# Altium PCB lightshowctl.PcbDoc
Units mil, origin at the board's own origin, x right, y up, seen from the top; angles counter-clockwise.
Board outline 900 x 6692.91 mil, 4 copper layers (Component Side, Ground Plane, Power Plane, Solder Side), stack 33.234 mil thick; 46 components, 37 nets, 236 pads, 70 vias.
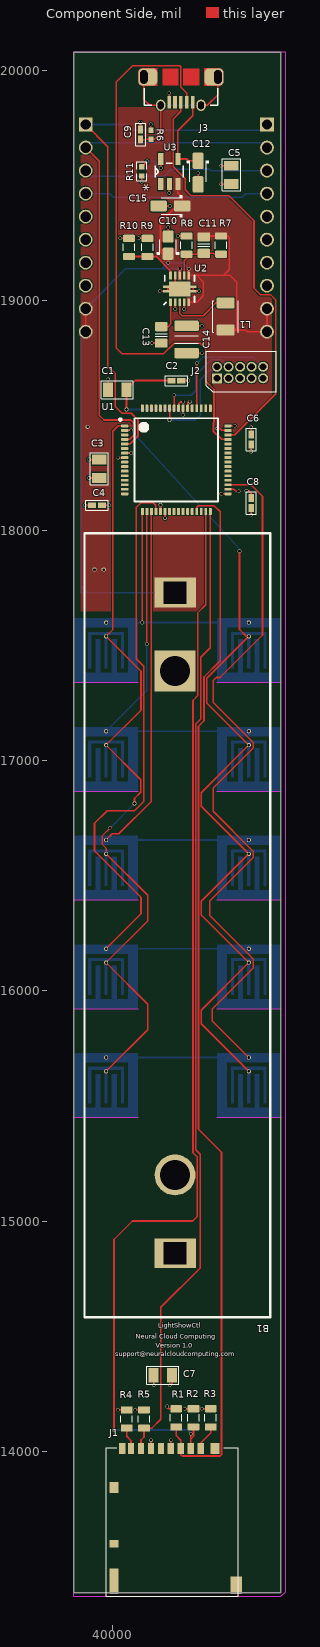
[diagram p0: Component Side view]
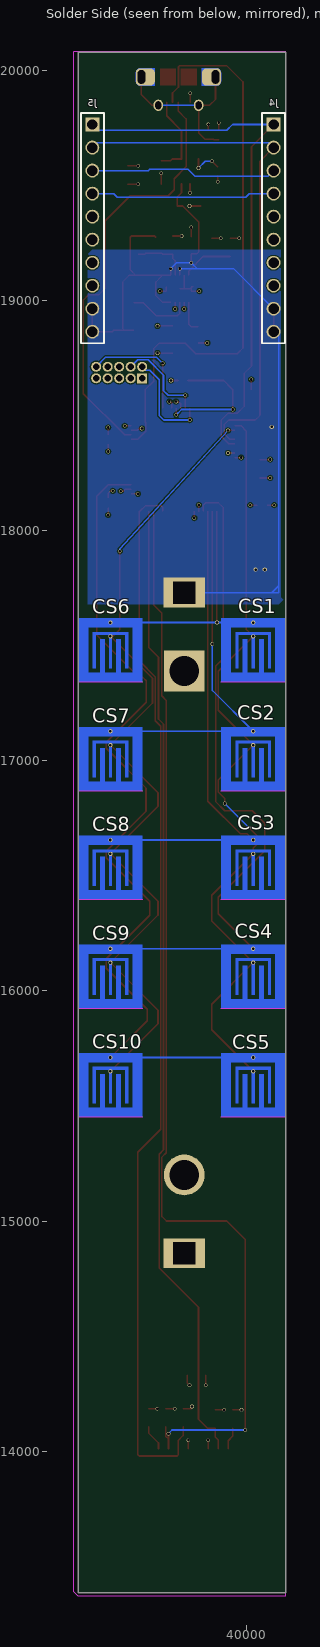
[diagram p1: Solder Side view, seen from below]
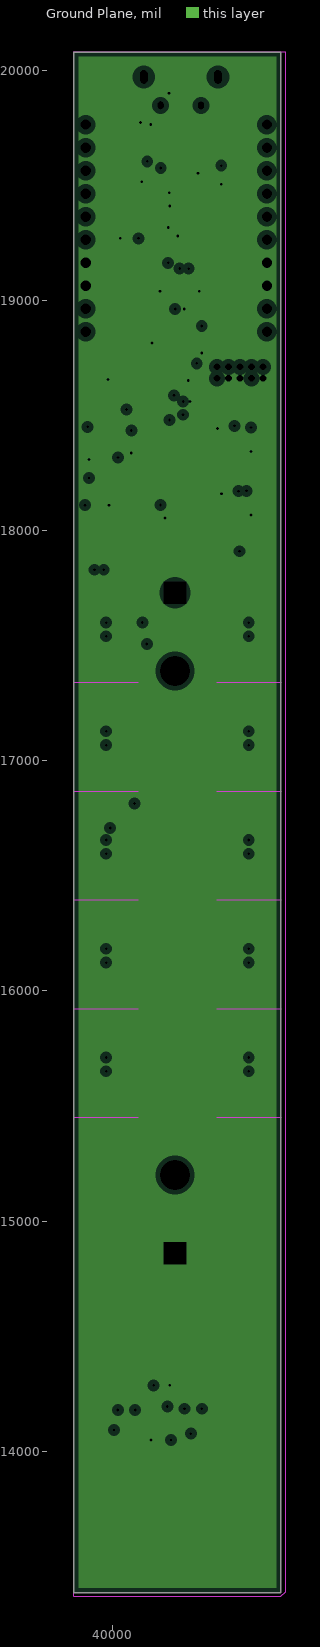
[diagram p2: Ground Plane, clearances drawn from the general rule]
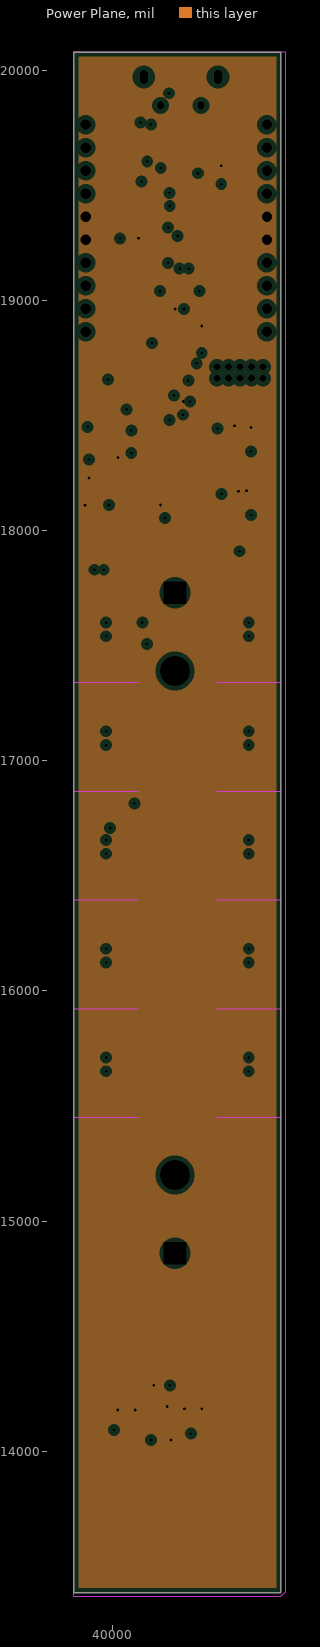
[diagram p3: Power Plane, clearances drawn from the general rule]
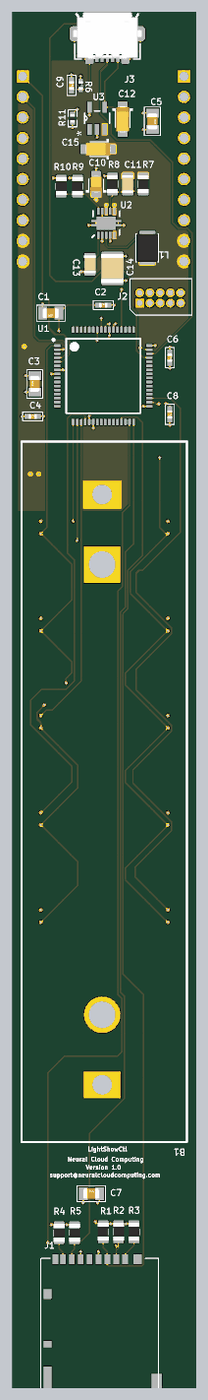
[diagram p4: 3D render of the assembled board from above, using the file's embedded part models]

## Layer stack, top to bottom
Top Solder: solder mask 0.4, Solder Resist, Dk 3.5
Component Side: signal copper 1.4
Dielectric 1: core 12.6, FR-4, Dk 4.8
Ground Plane: plane copper 1.417, net GND
Dielectric 3: prepreg 5, Dk 4.2
Power Plane: plane copper 1.417, net VCC
Dielectric 4: core 10, Dk 4.2
Solder Side: signal copper 1.4
Bottom Solder: solder mask 0.4, Solder Resist, Dk 3.5

## Board outline
39830,20078.74 39830,13385.83 40730,13385.83 40730,20078.74 40157.48,20078.74

## Design rules (kind name [scope] priority, off if disabled: settings)
Clearance [All] p1: gap=5
FanoutControl Fanout_Small [(CompPinCount < 5)] p4: bgadir=Out bgaviamode=Centered fanoutstyle=Auto fanoutdirection=InThenOut viagrid=1 // Fanout_Small (Default Rule)
Height [All] p1: minheight=0 maxheight=1968.5 prefheight=500
HoleSize [All] p1: absolutevalues=TRUE maxlimit=393.7 minlimit=1 maxpercent=80.000 minpercent=20.000
MinimumSolderMaskSliver [All] p1: minsoldermaskwidth=0.04
PlaneClearance [All] p1: clearance=20
PlaneConnect [All] p1: planeconnectstyle=Direct reliefexpansion=20 reliefentries=4 reliefconductorwidth=10 reliefairgap=10
PolygonConnect [All] p1: connectstyle=Direct reliefconductorwidth=10 reliefentries=4 polygonreliefangle="90 Angle" airgapwidth=10
RoomDefinition Sheet4_Switch [InComponentClass('Sheet4_Switch')] p1: confinementstyle=ConfineIn formatcopy=TRUE lockcomponents=FALSE outline 0,0 2000,0 2000,1000 0,1000
RoomDefinition Sheet3_Bat [InComponentClass('Sheet3_Bat')] p2: confinementstyle=ConfineIn formatcopy=TRUE lockcomponents=FALSE outline 0,0 2000,0 2000,1000 0,1000
RoomDefinition Sheet2_led [InComponentClass('Sheet2_led')] p3: confinementstyle=ConfineIn formatcopy=TRUE lockcomponents=FALSE outline 0,0 2000,0 2000,1000 0,1000
RoomDefinition Sheet1_Cpu [InComponentClass('Sheet1_Cpu')] p4: confinementstyle=ConfineIn formatcopy=TRUE lockcomponents=FALSE outline 0,0 2000,0 2000,1000 0,1000
RoutingLayers RoutingLayers_VCCBAT [InNet('VCCBAT')] p1 off: top layer_v5=TRUE bottom layer_v5=FALSE
RoutingLayers [All] p2: top layer_v5=TRUE bottom layer_v5=TRUE
RoutingTopology [All] p1: topology=Vertical
RoutingVias [All] p1: holewidth=11.81 width=15.75 viastyle="Through Hole" minholewidth=11.81 minwidth=15.75 maxholewidth=11.81 maxwidth=15.75
SMDNeckDown [All] p1: percent=50.000
SilkToSilkClearance [All] p1: silktosilkclearance=6
SilkToSolderMaskClearance [IsPad] p1: minsilkscreentomaskgap=4 clearancetoexposedcopper=TRUE
SolderMaskExpansion [All] p1: expansion=4
Width [All] p1: maxlimit=100 minlimit=5 preferedwidth=7 minimp=50.000000 maximp=50.000000 favimp=50.000000
20 further rules are at their usual default settings.

## Classes and differential pairs
component class Sheet1_Cpu: C1 C3 C5 C6 C7 C8 C9 J3 R6 U1
component class Sheet3_Bat: B1 C10 R7

## Components (designator, comment, footprint, x,y, rotation, side; value= is the part's Value field where it differs from the comment)
B1 "BK-18650-PC2" BK-18650-PC2 40270,16295 r270 top
C1 "" AP1-00041 40059.06,18612.2 r180 top
C2 "CAP-NONPOL" AP1-00001 40275.59,18651.57 r0 top
C3 "" AP1-00041 39940.94,18228.35 r90 top
C4 "CAP-NONPOL" AP1-00001 39931.1,18110.24 r0 top
C5 "" AP1-00041 40515,19585 r270 top
C6 "CAP-NONPOL" AP1-00001 40600.39,18395.67 r270 top
C7 "" AP1-00041 40177.17,14330.71 r0 top
C8 "CAP-NONPOL" AP1-00001 40600.39,18120.08 r270 top
C9 "CAP-NONPOL" AP1-00001 40120,19720 r270 top
C10 "10µ" CAPMP2012X150USR 40240,19240 r90 top
C11 "approved sub OK" CAPC2012X135N 40395,19240 r270 top
C12 "4µ7" CAPMP3216X180N 40370,19555 r270 top
C13 "approved sub OK" CAPC2012X135N 40210,18850 r270 top
C14 "approved sub OK" CAPC3225X220N 40320,18830 r270 top
C15 "4µ7" CAPMP3216X180N 40250,19410 r180 top
CS1 "QMatrix Button" QTOUCHSW 39970.47,17480.31 r180 bottom
CS2 "QMatrix Button" QTOUCHSW 39970.47,17007.87 r180 bottom
CS3 "QMatrix Button" QTOUCHSW 39970.47,16535.43 r180 bottom
CS4 "QMatrix Button" QTOUCHSW 39970.47,16062.99 r180 bottom
CS5 "QMatrix Button" QTOUCHSW 39970.47,15590.55 r180 bottom
CS6 "QMatrix Button" QTOUCHSW 40590.55,17480.31 r180 bottom
CS7 "QMatrix Button" QTOUCHSW 40590.55,17007.87 r180 bottom
CS8 "QMatrix Button" QTOUCHSW 40590.55,16535.43 r180 bottom
CS9 "QMatrix Button" QTOUCHSW 40590.55,16062.99 r180 bottom
CS10 "QMatrix Button" QTOUCHSW 40590.55,15590.55 r180 bottom
J1 "MicroSD" DM3AT-SF-PEJM5 40255.91,14015.75 r0 top
J2 "3220-10-0100 SWD" 3220-10-0100 40452.76,18661.42 r90 top
J3 "ZX62D-AB-5P8" AP8-00852 40295.28,19970.47 r180 top
J4 "PPTC101LFBN-RC" PPTC101LFBN-RC 39881.89,19763.78 r270 bottom
J5 "PPTC101LFBN-RC" PPTC101LFBN-RC 40669.29,19763.78 r270 bottom
L1 "NLCV32T" INDM3225X240N 40490,18930 r90 top
R1 "Thick Film" RESC2012X70N 40275,14145 r270 top
R2 "Thick Film" RESC2012X70N 40350,14145 r270 top
R3 "Thick Film" RESC2012X70N 40425,14145 r90 top
R4 "Thick Film" RESC2012X70N 40060,14140 r90 top
R5 "Thick Film" RESC2012X70N 40135,14140 r90 top
R6 "R2" AP2-00011 40165,19720 r270 top
R7 "Thick Film" RESC2012X70N 40470,19240 r270 top
R8 "Thick Film" RESC2012X70N 40320,19240 r90 top
R9 "Thick Film" RESC2012X70N 40150,19230 r270 top
R10 "Thick Film" RESC2012X70N 40070,19230 r90 top
R11 "2k" RESC1005X40N 40125,19560 r90 top
U1 "SAMD21TQFP64" TSQFP50P1300X1300X120-64N 40275.59,18307.09 r0 top
U2 "TPS61200DRCR" QFN-10_PAD 40290,19050 r0 top
U3 "MCP73831T-2DCI/OT" SOT95P270X145-5N 40245,19560 r90 top

## Footprints (in the part's own frame and the unit in brackets; to place one, negate y for a bottom-side part, rotate by r counter-clockwise, add the part's x,y. Pads: shape width x height; smd on the part's side, far side on the other; paste and mask are expansions set on the pad)
3220-10-0100 [mm]
  rect 1.1x1.1 hole 0.75: 1(0,0)
  round 1.1 hole 0.75: 2(1.27,0) 3(0,-1.27) 4(1.27,-1.27) 5(0,-2.54) 6(1.27,-2.54) 7(0,-3.81) 8(1.27,-3.81) 9(0,-5.08) 10(1.27,-5.08)
  silkscreen extent -1.5,-6.5 3,1.2
AP1-00001 [mm] "Standard 0402 SMD capacitor footprint"
  rect 0.9x0.6 smd: 1(-0.55,0) 2(0.55,0)
  silkscreen extent -1.25,-0.55 1.25,0.55, body extent -0.5,-0.3 0.5,0.3, height 0.2
AP1-00041 [mil]
  rect 43x63 smd: 1(0,0) 2(80,0)
  silkscreen extent -30,-39 109,39, body extent 1,-25 79,25, height 31
AP2-00011 [mm] "Chip Resistor, 2-Leads, Body 1,0x0,5mm, IPC High Density"
  rect 0.6x0.55 smd: 1(-0.5,0) 2(0.5,0)
  body extent -0.5,-0.3 0.5,0.3, height 0.2
AP8-00852 [mm] "Hirose, ZX Series, USB Micro-AB Recept-RA"
  rect 0.4x1.35 smd: 1(-1.3,2.8) 2(-0.65,2.8) 3(0,2.8) 4(0.65,2.8) 5(1.3,2.8)
  rrect52% 2.1x1.9 hole 0.825 slot 1.5 at 90 deg copper offset 0.437,0: 6(-4.088,0)
  rrect50% 2.1x1.9 on Top Paste: 6(-3.6,0) 7(3.6,0)
  rrect52% 2.1x1.9 hole 0.825 slot 1.5 at 90 deg copper offset -0.437,0: 7(4.088,0)
  rrect100% 1.05x1.25 hole 0.65 slot 0.85 at 90 deg: 8(-2.225,3.125) 9(2.225,3.125)
  rrect50% 1.05x1.25 on Top Paste: 8(-2.225,3.125) 9(2.225,3.125)
  Component Side region: 0.25,-0.95 2.05,-0.95 2.05,0.95 0.25,0.95
  Component Side region: -2.05,-0.95 -0.25,-0.95 -0.25,0.95 -2.05,0.95
  Component Side region: 2.6,-0.95 4.2,-0.95 4.294,-0.941 4.381,-0.915 4.434,-0.891 4.48,-0.862 4.52,-0.832 4.565,-0.791 4.596,-0.753 4.622,-0.716 4.647,-0.673 4.66,-0.64 4.676,-0.6 4.688,-0.55 4.696,-0.505 4.7,-0.45 4.7,0.45 4.696,0.503 4.689,0.548 4.677,0.599 4.661,0.641 4.641,0.683 4.617,0.724 4.589,0.761 4.56,0.797 4.521,0.831 4.483,0.86 4.439,0.888 4.397,0.908 4.354,0.924 4.301,0.939 4.248,0.946 4.2,0.95 2.6,0.95
  Component Side region: -2.6,0.95 -4.2,0.95 -4.294,0.941 -4.381,0.915 -4.434,0.891 -4.48,0.862 -4.52,0.832 -4.565,0.791 -4.596,0.753 -4.622,0.716 -4.647,0.673 -4.66,0.64 -4.676,0.6 -4.688,0.55 -4.696,0.505 -4.7,0.45 -4.7,-0.45 -4.696,-0.503 -4.689,-0.548 -4.677,-0.599 -4.661,-0.641 -4.641,-0.683 -4.617,-0.724 -4.589,-0.761 -4.56,-0.797 -4.521,-0.831 -4.483,-0.86 -4.439,-0.888 -4.397,-0.908 -4.354,-0.924 -4.301,-0.939 -4.248,-0.946 -4.2,-0.95 -2.6,-0.95
  Component Side pour cut-out: -3.75,1.975 3.75,1.975 3.75,-1.325 -3.75,-1.325
  Solder Side region: -2.6,0.95 -4.2,0.95 -4.294,0.941 -4.381,0.915 -4.434,0.891 -4.48,0.862 -4.52,0.832 -4.565,0.791 -4.596,0.753 -4.622,0.716 -4.647,0.673 -4.66,0.64 -4.676,0.6 -4.688,0.55 -4.696,0.505 -4.7,0.45 -4.7,-0.45 -4.696,-0.503 -4.689,-0.548 -4.677,-0.599 -4.661,-0.641 -4.641,-0.683 -4.617,-0.724 -4.589,-0.761 -4.56,-0.797 -4.521,-0.831 -4.483,-0.86 -4.439,-0.888 -4.397,-0.908 -4.354,-0.924 -4.301,-0.939 -4.248,-0.946 -4.2,-0.95 -2.6,-0.95
  Solder Side region: 2.6,-0.95 4.2,-0.95 4.294,-0.941 4.381,-0.915 4.434,-0.891 4.48,-0.862 4.52,-0.832 4.565,-0.791 4.596,-0.753 4.622,-0.716 4.647,-0.673 4.66,-0.64 4.676,-0.6 4.688,-0.55 4.696,-0.505 4.7,-0.45 4.7,0.45 4.696,0.503 4.689,0.548 4.677,0.599 4.661,0.641 4.641,0.683 4.617,0.724 4.589,0.761 4.56,0.797 4.521,0.831 4.483,0.86 4.439,0.888 4.397,0.908 4.354,0.924 4.301,0.939 4.248,0.946 4.2,0.95 2.6,0.95
  silkscreen extent -4.05,1.23 4.05,3.13, body extent -4.32,-2.65 4.33,3.25, height 2.78
BK-18650-PC2 [mm] "BC-86650-PC2 Battery Holder"
  rect 3.302x4.572 hole 2.438 square: 1(-36.45,0) 2(36.45,0)
  rect 4.5x4.5 hole 3.3: 3(-27.805,0)
  round 4.5 hole 3.3: 4(27.805,0)
  silkscreen extent -43,-10 43.5,10.5
CAPC2012X135N [mm] "Chip Capacitor, Body 2.0x1.2mm, EIA 0805, IPC Medium Density"
  round 0.254 on Mech15: 0(0,0)
  rrect25% 1x1.4 smd: 1(-0.9,0) 2(0.9,0)
  Component Side pour cut-out: -0.675,0.7 -0.475,0.9 0.475,0.9 0.675,0.7 0.675,-0.7 0.475,-0.9 -0.475,-0.9 -0.675,-0.7
  silkscreen extent -0.15,-0.65 0.15,0.65, body extent -1.1,-0.72 1.1,0.73, height 1.34
CAPC3225X220N [mm] "Chip Capacitor, Body 3.2x2.5mm, EIA 1210, IPC Medium Density"
  round 0.508 on Mech15: 0(0,0)
  rrect25% 1.15x2.7 smd: 1(-1.5,0) 2(1.5,0)
  silkscreen extent -0.4,-1.3 0.4,1.3, body extent -1.8,-1.4 1.8,1.4, height 2.19
CAPMP2012X150USR [mm] "Molded body capacitor, Body 2.0x1.2mm, 0805, IPC Medium Density"
  round 0.254 on Mech15: 0(0,0)
  rrect25% 1.35x1.2 smd: 1(-0.95,0) 2(0.95,0)
  Component Side pour cut-out: -0.4,0.8 0.4,0.8 0.4,-0.8 -0.4,-0.8
  silkscreen extent -1,-1.2 0.6,1.2, body extent -1.02,-0.67 1.03,0.68, height 1.5
CAPMP3216X180N [mm] "Capacitor, polarized, Molded Body, EIA 535BAAC size A; 3.20mm L X 1.60mm W X 1.80mm H"
  round 0.508 on Mech15: 0(0,0)
  rrect25% 1.8x1.2 smd: 1(-1.3,0) 2(1.3,0)
  silkscreen extent -1.3,-1.2 1,1.2, body extent -1.6,-0.8 1.6,0.8, height 1.8
DM3AT-SF-PEJM5 [mm]
  rect 0.7x1.2 smd: 1(3.2,-0.1) 2(2.1,-0.1) 3(1,-0.1) 4(-0.1,-0.1) 5(-1.2,-0.1) 6(-2.3,-0.1) 7(-3.4,-0.1) 8(-4.5,-0.1) B(-5.45,-0.1)
  rect 1x0.8 smd: A(-6.4,-10.6)
  rect 1x1.2 smd: MOUNT0(4.75,-0.1) MOUNT1(-6.4,-4.4)
  rect 1x2.8 smd: MOUNT2(-6.4,-14.75)
  rect 1.3x1.9 smd: MOUNT3(7.1,-15.2)
  silkscreen extent -7.24,-16.38 7.35,0
INDM3225X240N [mm] "Molded Inductor, 2-Leads, Body 3.2x2.5mm, IPC Medium Density"
  round 0.508 on Mech15: 0(0,0)
  rrect25% 1.2x2 smd: 1(-1.5,0) 2(1.5,0)
  silkscreen extent -1.75,-1.4 1.75,1.4, body extent -1.79,-1.35 1.79,1.35, height 2.4
PPTC101LFBN-RC [mil] "Sullins 10 Pin .100 spacing Femal connector - Single Role"
  rect 60x60 hole 45: 1(0,0)
  round 60 hole 45: 2(100,0) 3(200,0) 4(300,0) 5(400,0) 6(500,0) 7(600,0) 8(700,0) 9(800,0) 10(900,0)
  silkscreen extent -50,-50 950,50
QFN-10_PAD [mm]
  rect 0.297x0.85 smd: 1(-1,-1.475) 2(-0.5,-1.475) 3(0,-1.475) 4(0.5,-1.475) 5(1,-1.475) 6(1,1.475) 7(0.5,1.475) 8(0,1.475) 9(-0.5,1.475) 10(-1,1.475)
  rect 0.7x0.28 smd: 11(-1.5,0.25) 12(-1.5,-0.25) 13(1.5,0.25) 14(1.5,-0.25)
  rect 2.4x1.65 smd: 15(0,0)
  silkscreen extent -1.75,-1.75 1.65,1.5
QTOUCHSW [mil]
  round 18 hole 11: X(0,120) Y(0,60)
  Component Side region: 76.77,78.74 76.77,-78.74 64.96,-78.74 64.96,66.93 5.91,66.93 5.91,-78.74 -5.91,-78.74 -5.91,66.93 -64.96,66.93 -64.96,-78.74 -64.96,-78.74 -76.77,-78.74 -76.77,78.74 76.77,78.74 76.77,78.74
  Component Side region: 137.8,137.8 -137.8,137.8 -137.8,-137.8 137.8,-137.8 137.8,137.8 96.46,98.43 96.46,-98.43 45.28,-98.43 45.28,47.24 25.59,47.24 25.59,-98.43 -25.59,-98.43 -25.59,47.24 -45.28,47.24 -45.28,-98.43 -96.46,-98.43 -96.46,98.43 96.46,98.43 137.8,137.8
  Keep-Out Layer lines w5: 140,-140 -140,-140
RESC1005X40N [mm] "Chip Resistor, Body 1.0x0.5mm, EIA 0402, IPC Medium Density"
  round 0.2 on Mech15: 0(0,0)
  rrect20% 0.6x0.6 smd: 1(-0.5,0) 2(0.5,0)
  Component Side pour cut-out: -0.325,0.375 -0.2,0.5 0.2,0.5 0.325,0.375 0.325,-0.375 0.2,-0.5 -0.2,-0.5 -0.325,-0.375
  silkscreen extent -1.05,-0.55 1.05,0.55, body extent -0.52,-0.27 0.53,0.28, height 0.4
RESC2012X70N [mm] "Chip Resistor, Body 2.0x1.2mm, EIA 0805, IPC Medium Density"
  round 0.254 on Mech15: 0(0,0)
  rrect25% 0.8x1.3 smd: 1(-1,0) 2(1,0)
  Component Side pour cut-out: -0.725,0.65 -0.525,0.85 0.525,0.85 0.725,0.65 0.725,-0.65 0.525,-0.85 -0.525,-0.85 -0.725,-0.65
  silkscreen extent -0.38,-0.64 0.38,0.64, body extent -1.1,-0.67 1.1,0.68, height 0.69
SOT95P270X145-5N [mil]
  rect 52x22 smd: 1(-54,37) 2(-54,0) 3(-54,-37) 4(54,-37) 5(54,37)
  silkscreen extent -25,-61 35,61
TSQFP50P1300X1300X120-64N [mm] "TSQFP, 64-Leads, Body 10.00x10.00mm, Pitch 0.50mm, IPC Medium Density"
  rrect50% 0.8x0.32 smd: 1(-5.7,3.75) 2(-5.7,3.25) 3(-5.7,2.75) 4(-5.7,2.25) 5(-5.7,1.75) 6(-5.7,1.25) 7(-5.7,0.75) 8(-5.7,0.25) 9(-5.7,-0.25) 10(-5.7,-0.75) 11(-5.7,-1.25) 12(-5.7,-1.75) 13(-5.7,-2.25) 14(-5.7,-2.75) 15(-5.7,-3.25) 16(-5.7,-3.75) 33(5.7,-3.75) 34(5.7,-3.25) 35(5.7,-2.75) 36(5.7,-2.25) 37(5.7,-1.75) 38(5.7,-1.25) 39(5.7,-0.75) 40(5.7,-0.25) 41(5.7,0.25) 42(5.7,0.75) 43(5.7,1.25) 44(5.7,1.75) 45(5.7,2.25) 46(5.7,2.75) 47(5.7,3.25) 48(5.7,3.75)
  rrect50% 0.32x0.8 smd: 17(-3.75,-5.7) 18(-3.25,-5.7) 19(-2.75,-5.7) 20(-2.25,-5.7) 21(-1.75,-5.7) 22(-1.25,-5.7) 23(-0.75,-5.7) 24(-0.25,-5.7) 25(0.25,-5.7) 26(0.75,-5.7) 27(1.25,-5.7) 28(1.75,-5.7) 29(2.25,-5.7) 30(2.75,-5.7) 31(3.25,-5.7) 32(3.75,-5.7) 49(3.75,5.7) 50(3.25,5.7) 51(2.75,5.7) 52(2.25,5.7) 53(1.75,5.7) 54(1.25,5.7) 55(0.75,5.7) 56(0.25,5.7) 57(-0.25,5.7) 58(-0.75,5.7) 59(-1.25,5.7) 60(-1.75,5.7) 61(-2.25,5.7) 62(-2.75,5.7) 63(-3.25,5.7) 64(-3.75,5.7)
  silkscreen extent -6.3,-4.6 4.6,4.6

## Part data
B1: "BK-18650-PC2 HOLDER BATT 1/LI-ION PROTECTED"
C1 C3 C5 C7: library part A01-0360, "Ceramic capacitor, SMD 0805, X5R, 10V, 10 %, (de19441)"
C2 C4 C6 C8 C9: library part A01-0246, "Ceramic capacitor, SMD 0402, X7R, 16V, +/-10%"
C10: library part CAPT_10u_0805_10V, "Capacitor SMD Tantalum 10uF 20% 10V 0805"
C11 C13: library part CAPC_100n_0805_X7R_100V_10%, "Capacitor SMD Cer 100nF 10% 100V X7R 0805"
C12 C15: library part CAPT_4u7_3216_16V, "Capacitor SMD Tantalum 4.7uF 10% 16V 3216-18"
C14: library part CAPC_22u_1210_16V, "Capacitor SMD Cer 22uF 20% 16V X7R 1210"
CS1 CS2 CS3 CS4 CS5 CS6 CS7 CS8 CS9 CS10: library part QMatrixButton
J1: library part DM3AT-SF-PEJM5, "Hirose Electric Micro SD - DM3AT-SF-PEJM5"
J2: library part 3220-10-0100-00, "HiRose 3220-10-0100 BOX HEADER, 0.050 10 POS"
J3: library part A08-2112, "Hirose ZX62D-AB-5P8 Micro USB AB Connector, Standard SMT + DIP"
J4 J5: "Sullins PPTC101LFBN-RC 10 Position Header Connector 0.100\" (2.54mm) Through Hole Tin"
L1: library part INDC_2u2_1210_1200mA, "Inductor 2.2uH 1.2A 1210 SMD chip"
R1 R2 R3 R4 R5: library part RES_51K_0805_1%, "Resistor SMD chip 51k Ohm 0.125W 1% 0805"
R6: library part A02-0284, "Thick film resistor, SMD 0402, 1/16W, 1%"
R7: library part RES_2M_0805_1%, "Resistor SMD chip 2M Ohm 0.125W 1% 0805"
R8 R10: library part RES_220K_0805_1%, "Resistor SMD chip 220k Ohm 0.125W 1% 0805"
R9: library part RES_1p2m_0805_1%, "Resistor SMD chip 1.2M Ohm 0.125W 1% 0805"
R11: library part RES_2K_0402_1%, "Resistor SMD chip 2k Ohm 0.063W 1% 0402"
U1: library part ATSAMD21J18A-AUT
U2: "TPS61200DRCR Boost Switching Regulator IC Positive Adjustable 1.8V 1 Output 1.2A (Switch) 10-VFDFN Exposed Pad"
U3: "IC CONTROLLR LI-ION 4.2V SOT23-5"

## Via types
v1: diameter 15.75, hole 11.81, Component Side to Solder Side, 67 vias
v2: diameter 18, hole 11, Component Side to Solder Side, 3 vias

## Nets (pads, with @x,y where several pads share a name; then routed paths per layer and width w, separated by ;. In a path a pad name is that pad's centre, name@x,y a point inside that pad or via, vN(x,y) a via of type N, cw(c..) or ccw(c..) an arc to the next point about the centre after c; other vN are vias at no path point)
CLK0: J4.2 J5.2 U1.4 | length 2261.7
  Component Side w6.3: U1.4 40072.67,18395.67 40097,18420
  Component Side w7: J4.2 39941,19604.67 39941,18500 39961,18480 40077,18480 40097,18460 40097,18420
  Solder Side w7: J4.2 39903.11,19685 40648.07,19685 J5.2
CLK31: J4.4 J5.4 | length 800.5
  Solder Side w7: J4.4 39987,19463.78 40002.78,19448 40561,19448 40576.78,19463.78 J5.4
DAT0: J4.1 J5.1 U1.5 | length 2366.2
  Component Side w6.3: U1.5 40076,18375.98 40109,18408.98
  Component Side w7: J4.1 39978,19667.67 39978,18714 40010,18682 40010,18539 40040,18509 40080,18509 40109,18480 40109,18408.98
  Solder Side w7: J4.1 40060,19763.78 40084.78,19739 40669.29,19739 J5.1
DAT31: J4.3 J5.3 | length 811.4
  Solder Side w7: J4.3 39905.67,19540 40225,19540 40254,19569 40420,19569 40425.22,19563.78 J5.3
GND: B1.2 C1.2 C2.2 C3.2 C4.2 C5.2 C6.2 C7.2 C8.2 C9.1 C10.2 C12.2 C13.2 C14.2 C15.2 J1.6 J2.3 J2.5 J2.9 J3.5 J4.7 J4.8 J5.7 J5.8 R6.1 R8.2 R10.2 R11.1 U1.7 U1.22 U1.33 U1.47 U1.54 U2.4 U2.9 U2.11 U2.12 U2.13 U2.14 U2.15 U3.2 | length 1287.6
  Component Side w5.51: U2.12 40239,19040.16 40239,19050 ; U2.11 40239,19059.84 40239,19050 ; U2.14 40349,19040.16 40349,19059.84 U2.13 ; 40239,19050 40270.31,19050 U2.15 40239,19050
  Component Side w5.84: U2.15@40270.31,19050 U2.9
  Component Side w6.3: U1.54 40324.8,18555 40329.92,18560.12 v1(40334.8,18560.12) ; 40465.51,18443.09 40473.56,18435.04 U1.47
  Component Side w7: v1(39896.57,18308.35) C3.2 ; C4.2 v1(39983.35,18110.24) ; C1.2 v1(39979.06,18656.58) ; v1(40031.53,19269.37) R10.2 ; U1.7 v1(40079.8,18336.61) ; C9.1 v1(40120,19772.25) ; v1(40125,19515.63) R11.1 ; R6.1 v1(40165,19764.37) ; J1.6 v1(40165.36,14048.3) ; v1(40169.57,18814.57) C13.2 ; C15.2 v1(40247.13,19410) ; v1(40204.29,19040.16) U2.12 ; v1(40226.38,18054.06) U1.22 ; C10.2 v1(40240,19316.85) ; J3.5 v1(40244.09,19899.69) ; v1(40245,19467.13) U3.2 ; v1(40247.17,14286.33) 40257.17,14296.33 C7.2 ; v1(40281.53,19279.37) R8.2 ; C2.2 v1(40327.84,18651.57) ; v1(40309.69,18962.33) U2.4 ; C14.2 v1(40386.02,18770.94) ; U2.14 v1(40375.71,19040.16) ; C12.2 v1(40370,19552.13) ; v1(40454.02,18443.09) 40465.51,18443.09 ; v1(40470.63,19505) C5.2 ; v1(40471.38,18159.45) U1.33 ; v1(40600.39,18067.83) C8.2 ; v1(40600.39,18343.42) C6.2
MISO: J1.7 R5.1 U1.32 | length 4231.9
  Component Side w6.3: 40423.23,17490.23 U1.32
  Component Side w7: J1.7 40122.05,14049 40135,14061.95 R5.1 40170,14100.63 40208,14138.63 40208,14625 40379.08,14796.08 40379.08,15290.31 40360,15309.4 40360,17159 40382,17181 40382,17449 40423.23,17490.23
MOSI: J1.3 R1.2 U1.29 | length 4620.6
  Component Side w6.3: U1.29 40364.17,18101.17 40370,18107 40440,18107
  Component Side w7: R1.2 40275,14068.28 40295.28,14048 J1.3 40295.28,13985 40301.28,13979 40466,13979 40472,13985 40472,15299 40372,15399 40372,17150.01 40395.89,17173.9 40395.89,17363.89 40466,17434 40466,18081 40440,18107
NetC9_2: C9.2 J3.6@40456.2,19970.47 J3.7@40134.35,19970.47 J3.8@40382.87,19847.44 J3.9@40207.68,19847.44 R6.2 | length 745.5
  Component Side w7: C9.2 40141,19698.35 40142.97,19700.31 R6.2 40180,19700.31 40207.68,19727.99 40207.68,19847.44 40160,19847.44 40134.35,19873.09 J3.7@40134.35,19970.47 ; J3.8@40382.87,19847.44 40410.44,19847.44 40456.2,19893.2 J3.6@40456.2,19970.47
  Solder Side w7: J3.9@40207.68,19847.44 J3.8@40382.87,19847.44
NetC13_1: C13.1 U2.1 | length 140.9
  Component Side w5.84: 40250.63,18896.06 U2.1
  Component Side w7: C13.1 40240,18885.43 40250.63,18896.06
NetJ1_1: J1.1 R3.1 | length 111.7
  Component Side w7: J1.1 40381.89,14035.89 40425,14079 R3.1
NetJ1_8: J1.8 R4.1 | length 96.6
  Component Side w7: R4.1 40060,14064.74 40078.74,14046 J1.8
NetL1_2: L1.2 U2.3 | length 276.3
  Component Side w5.84: 40290,18943 U2.3
  Component Side w7: 40290,18943 40300,18933 40392,18933 40448.06,18989.06 L1.2
NetR9_2: R9.2 R10.1 U2.10 | length 226.1
  Component Side w5.84: 40187.37,19190.63 40250.63,19127.37 U2.10
  Component Side w7: R10.1 40110,19190.63 R9.2 40187.37,19190.63
NetR11_2: R11.2 U3.5 | length 144.1
  Component Side w7: R11.2 v1(40149.31,19604) ; v1(40208,19575) U3.5
  Solder Side w7: v1(40149.31,19604) 40179,19604 v1(40208,19575)
PTCX0: CS1.X CS6.X U1.17 | length 1102.4
  Component Side w6.3: v1(40127.95,17600.32) U1.17
  Solder Side w7: CS1.X v1(40127.95,17600.32) CS6.X
PTCX1: CS2.X CS7.X U1.18 | length 1648.3
  Component Side w6.3: v1(40147.64,17507) U1.18
  Solder Side w7: v1(40147.64,17507) 40147.64,17305.04 CS2.X CS7.X
PTCX2: CS3.X CS8.X U1.19 | length 2145.2
  Component Side w6.3: 40167.32,16824.32 U1.19
  Component Side w7: CS3.X 39997.52,16682.48 40025.48,16682.48 40167.32,16824.32
  Solder Side w7: CS3.X CS8.X
PTCX3: CS4.X CS9.X U1.20 | length 2980.7
  Component Side w6.3: 40176,18120 40187.01,18108.99 U1.20
  Component Side w7: CS4.X 40122,16334.52 40122,16407 39920,16609 39920,16728 39975,16783 40094,16783 40134,16823 40134,17410 40101,17443 40101,18100 40121,18120 40176,18120
  Solder Side w7: CS4.X CS9.X
PTCX4: CS5.X CS10.X U1.35 | length 3838.9
  Component Side w6.3: U1.35 40600,18198.82
  Component Side w7: CS10.X 40431,15870.1 40431,15920 40609,16098 40609,16139 40420,16328 40420,16389 40609,16578 40609,16607 40436,16780 40436,16881 40609,17054 40609,17080 40435.27,17253.73 40435.27,17347.27 40449.58,17361.58 40465.33,17361.58 40650,17546.25 40650,18148.82 40600,18198.82
  Solder Side w7: CS5.X CS10.X
PTCY0: CS1.Y CS2.Y CS3.Y CS4.Y CS5.Y U1.1 | length 3418.6
  Component Side w6.3: 40000,18432.16 40022.56,18454.72 U1.1
  Component Side w7: CS5.Y 40151,15831.08 40151,15942.46 CS4.Y 40151,16303.52 40151,16414.91 CS3.Y 39970.47,16620.43 39952.97,16637.93 39952.97,16672.97 v1(39988,16708) ; 40000,18432.16 40000,17569.84 CS1.Y 40122,17388.79 40122,17219.4 CS2.Y 40121.47,16916.87 40121.47,16863.32 40094,16835.85 v1(40094,16814)
  Solder Side w7: v1(39988,16708) v1(40094,16814)
PTCY1: CS6.Y CS7.Y CS8.Y CS9.Y CS10.Y U1.2 | length 3683.3
  Component Side w6.3: U1.2 v1(40080,18435.04)
  Component Side w7: v1(40550,17910) 40550,17570 40579.68,17540.32 CS6.Y 40407.89,17357.66 40407.89,17250.53 CS7.Y 40384,16861.32 40384,16801.99 CS8.Y 40384,16388.88 40384,16329.54 CS9.Y 40384,15916.44 40384,15857.1 CS10.Y
  Solder Side w7: v1(40080,18435.04) 40550,17920 v1(40550,17910)
PTCY2: U1.13
RESETN: J2.10 U1.52 | length 512.1
  Component Side w6.3: U1.52 v1(40364.17,18726.17)
  Solder Side w7: v1(40364.17,18726.17) 40391.57,18753.57 40610.6,18753.57 J2.10
SCK: J1.5
SCL: U1.50
SCLK: U1.30
SDA: U1.49
SS: J1.2 R2.2 U1.31 | length 4787.1
  Component Side w6.3: 40403.54,17677.54 U1.31
  Component Side w7: v1(40005,14092) 40005,14920 40085,15000 40347.08,15000 40367.08,15020 40367.08,15278 40348,15297.08 40348,17262 40368,17282 40368,17642 40403.54,17677.54 ; J1.2 40338.59,14053 ; v1(40338.59,14076.41) 40338.59,14053 ; R2.2 40350,14064.41 40338.59,14053
  Solder Side w7: v1(40005,14092) 40323,14092 v1(40338.59,14076.41)
SWCLK: J2.4 U1.57 | length 408.9
  Component Side w6.3: U1.57 v1(40265.75,18587.29)
  Solder Side w7: v1(40265.75,18587.29) 40340,18587.29 40360,18607.29 40360,18675 40426.57,18741.57 40472.6,18741.57 J2.4
SWDIO: J2.2 U1.58 | length 444.8
  Component Side w6.3: v1(40246.06,18480) U1.58
  Solder Side w7: v1(40246.06,18480) 40359,18480 40379,18500 40379,18655 40420,18696 40437.34,18696 J2.2
USB_N: J3.2 U1.45 | length 2513.5
  Component Side w6.3: 40437,18430.67 40472,18395.67 U1.45
  Component Side w7: J3.2 40320.87,19901 40295,19926.87 40295,20015 40290,20020 40086,20020 40015,19949 40015,18793 40040,18768 40220,18768 40266,18814 40380,18814 40403,18791 40403,18649 40439,18613 40439,18470 40437,18468 40437,18430.67
USB_P: J3.3 U1.46 | length 1869.6
  Component Side w6.3: U1.46 40529,18415.35 40708,18594.35
  Component Side w7: J3.3 40295.28,19821.28 40262,19788 40262,19580 40314,19528 40314,19480 40339,19455 40504,19455 40613,19346 40613,19052 40640,19025 40685,19025 40708,19002 40708,18594.35
UVLO: C11.2 R7.2 R8.1 U2.7 | length 250.1
  Component Side w5.84: U2.7 40309.69,19171.69
  Component Side w7: 40309.69,19171.69 40320,19182 R8.1 40363.06,19200.63 40367,19204.57 C11.2 40437,19204.57 40440.94,19200.63 R7.2
VBUS: C12.1 J3.1 U3.4 | length 364.2
  Component Side w7: J3.1 40346.46,19801.46 40282,19737 U3.4 40322,19614 40329.82,19606.18 C12.1
VCC: C3.1 C4.1 C5.1 C6.1 C7.1 C8.1 C14.1 J1.4 J4.5 J4.6 J5.5 J5.6 R1.1 R2.1 R3.2 R4.2 R5.2 R9.1 U1.8 U1.21 U1.34 U1.48 U1.56 U2.2 | length 786.3
  Component Side w6.3: U1.56 40285.43,18550 40295.55,18560.12 v1(40305.43,18560.12)
  Component Side w7: v1(39878.86,18110.24) C4.1 ; v1(39896.57,18228.35) C3.1 ; v1(40021.53,14179.37) R4.2 ; v1(40022.56,18316.93) U1.8 ; v1(40096.53,14179.37) R5.2 ; v1(40111.53,19269.37) R9.1 ; v1(40177.17,14286.33) C7.1 ; U1.21 v1(40206.69,18111.3) ; v1(40236.53,14194.37) 40236.53,14190 40242.16,14184.37 R1.1 ; J1.4 v1(40251.97,14048.3) ; v1(40270.31,18962.33) U2.2 ; v1(40311.53,14184.37) R2.1 ; C14.1 v1(40386.02,18889.06) ; v1(40386.53,14184.37) R3.2 ; v1(40470.63,19585) C5.1 ; U1.34 40526.44,18179.13 40534.49,18171.09 v1(40545.98,18171.09) ; U1.48 v1(40528.62,18454.72) ; v1(40580.39,18172.32) 40590,18172.32 40600.39,18161.93 C8.1 ; C6.1 v1(40600.39,18447.92)
VCCBAT: B1.1 C10.1 C11.1 C15.1 J4.9 J4.10 J5.9 J5.10 L1.1 R7.1 U2.5 U2.6 U2.8 U3.3 | length 3984.5
  Component Side w5.84: U2.8 v1(40290,19138) ; U2.5 40329.37,18991 40364,18991 ; v1(40329.37,19137.67) U2.6 40329.37,19108 40365,19108 40480,19108 40510,19108
  Component Side w7: J4.10 J4.9 ; v1(40240,19163) C10.1 40214.4,19202.6 40207,19210 40207,19340 40277,19410 C15.1 40301.18,19448 40282,19467.18 U3.3 ; 40364,18991 40393,19020 40393,19080 40365,19108 ; C11.1 40398.94,19279.37 R7.1 40500,19279.37 40505,19274.37 40505,19133 40480,19108 ; L1.1 40530,18870.94 ; 40510,19108 40538,19080 40538,18878.94 40530,18870.94 ; J5.9 J5.10 40583.16,18863.78 40576,18870.94 40530,18870.94
  Solder Side w7: J4.10 39860.04,18841.93 39860.04,17760 ; J4.9 40056.11,19138 40215,19138 ; B1.1 39890,17730.04 ; v1(40290,19138) 40215,19138 ; v1(40329.37,19137.67) 40304.04,19163 v1(40240,19163) 40215,19138 ; 39860.04,17760 39860.04,17730.04 39890,17730.04 ; 39860.04,17760 39890,17730.04
  other v2: 39920,17830 39960,17830 39890,18450
VCORE: C1.1 C2.1 U1.55 | length 581.2
  Component Side w6.3: v1(40305,18503.12) 40305.12,18503.24 U1.55
  Component Side w7: v1(40059.06,18526) C1.1 40098.43,18651.57 C2.1
  Solder Side w7: v1(40059.06,18526) 40282.12,18526 v1(40305,18503.12)
pads on no net: B1.3 B1.4 C10.0 C11.0 C12.0 C13.0 C14.0 C15.0 J1.A J1.B J1.MOUNT0 J1.MOUNT1 J1.MOUNT2 J1.MOUNT3 J2.1 J2.6 J2.7 J2.8 J3.4 J3.6@40437.01,19970.47 J3.7@40153.54,19970.47 J3.8@40382.87,19847.44 J3.9@40207.68,19847.44 L1.0 R1.0 R2.0 R3.0 R4.0 R5.0 R7.0 R8.0 R9.0 R10.0 R11.0 U1.3 U1.6 U1.9 U1.10 U1.11 U1.12 U1.14 U1.15 U1.16 U1.23 U1.24 U1.25 U1.26 U1.27 U1.28 U1.36 U1.37 U1.38 U1.39 U1.40 U1.41 U1.42 U1.43 U1.44 U1.51 U1.53 U1.59 U1.60 U1.61 U1.62 U1.63 U1.64 U3.1

## Polygon pours and split planes (outlines as drawn)
VCCBAT on Component Side "VCCBATTOP" (solid, remove dead copper, pour order 2): 39860,19830 39870,19840 40690,19840 40690,17650 39860,17650 39860,19830
VCCBAT on Solder Side "VCCBATBOT" (solid, remove dead copper, pour order 4): 39850,19220 39850,17710 39840,17700 39860,17680 40690,17680 40690,19200 40680,19210 40670,19220 39850,19220
GND on Ground Plane (split plane): 40709.9,13405.92 39850.1,13405.92 39850.1,20058.64 40709.9,20058.64
VCC on Power Plane (split plane): 40709.9,13405.92 39850.1,13405.92 39850.1,20058.64 40709.9,20058.64

## Keep-outs
Keep-Out Layer:
  lines w5: 39830,13370 40730,13370 40750,13390 40750,20080 39830,20080 39830,13380 39830,13370

## Silkscreen, mask and mechanical layers (free items; w line width, h text height)
Top Overlay:
  text "LightShowCtl" at 40196.85,14537.4 h20
  text "Neural Cloud Computing" at 40098.43,14488.19 h20
  text "Version 1.0" at 40187.01,14448.82 h20
  text "support@neuralcloudcomputing.com" at 40010.31,14411.93 h20
Mechanical 15:
  lines w10: 39832.68,20245.91 39832.68,20265.91 ; 39892.68,20235.91 39832.68,20255.91 ; 39892.68,20275.91 39832.68,20255.91 ; 39914.63,20255.91 39832.68,20255.91 ; 40646.4,20255.91 40728.35,20255.91 ; 40668.35,20235.91 40728.35,20255.91 ; 40668.35,20275.91 40728.35,20255.91 ; 40728.35,20245.91 40728.35,20265.91 ; 40796.93,13918.71 40816.93,13858.71 ; 40796.93,20491.63 40816.93,20551.63 ; 40806.93,13858.71 40826.93,13858.71 ; 40806.93,20551.63 40826.93,20551.63 ; 40816.93,16814.29 40816.93,13858.71 ; 40816.93,17596.05 40816.93,20551.63 ; 40836.93,13918.71 40816.93,13858.71 ; 40836.93,20491.63 40816.93,20551.63
  text "895.669 (mil)" at 39924.63,20219.92 h60
  text "6692.913 (mil)" at 40852.92,16824.29 h60 r90

## Text inside footprints (layer, text, board x,y; h text height)
U3: Top Overlay "*" at 40191,19473 h77.5 r90; Mechanical 16 "*" at 40191,19473 h77.5 r90